# Altium PCB BLE_PCB_Rev2.PcbDoc (part 1 of 2)
Units mm, origin at the board's own origin, x right, y up, seen from the top; angles counter-clockwise.
Board outline 81.41 x 40.9 mm, 2 copper layers (Top Layer, Bottom Layer), stack 1.57 mm thick; 28 components, 29 nets, 238 pads, 40 vias.
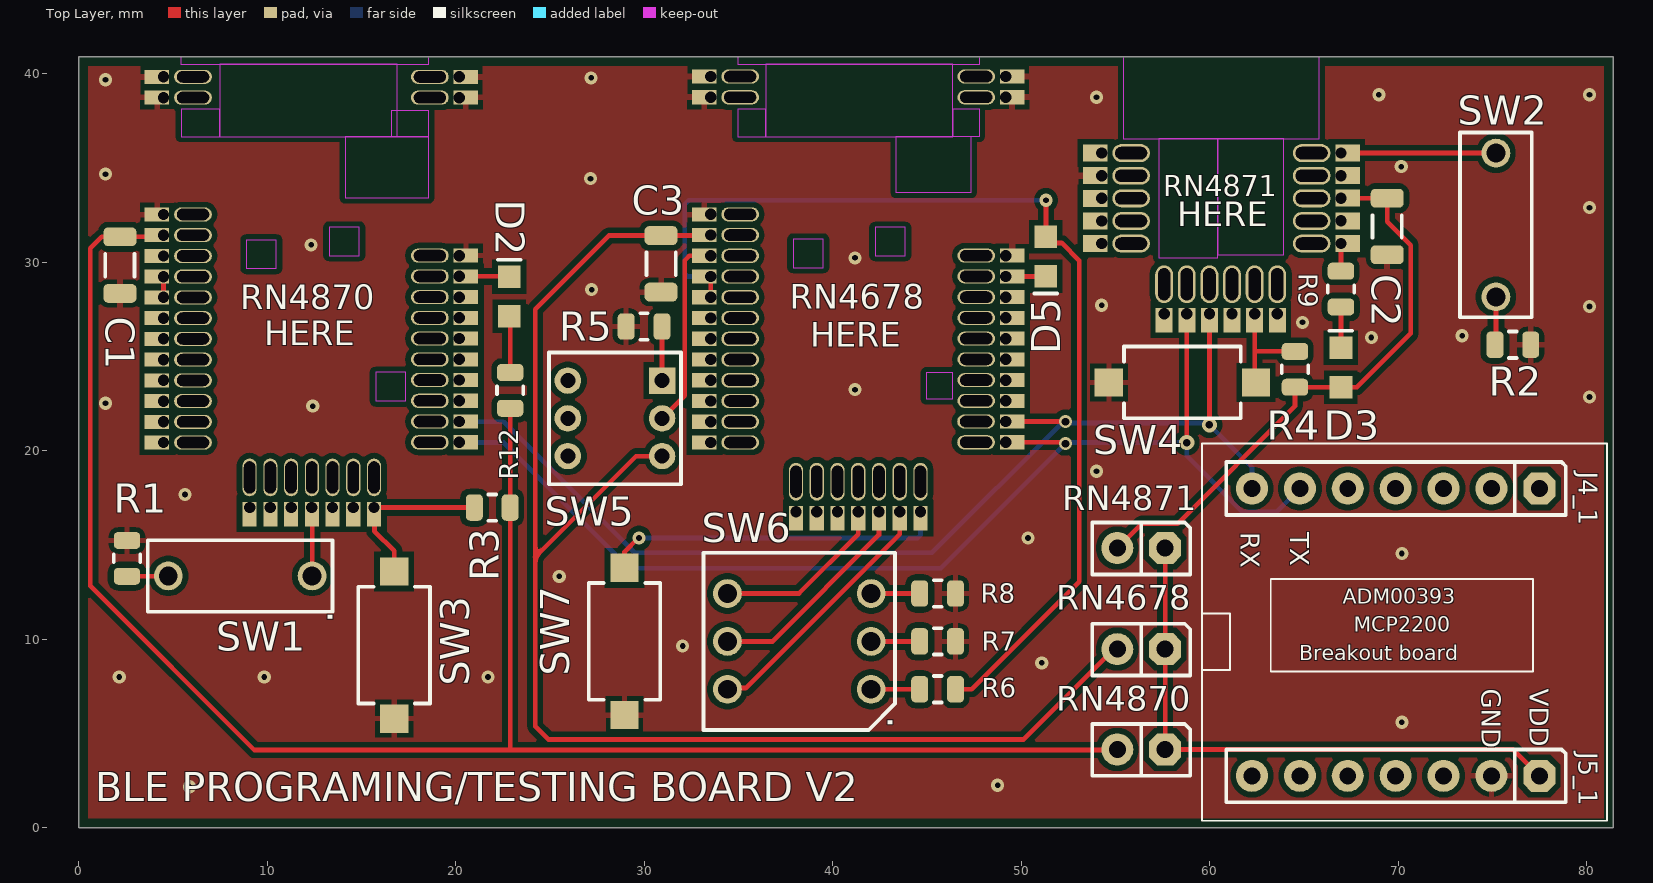
[diagram p0: Top Layer view]
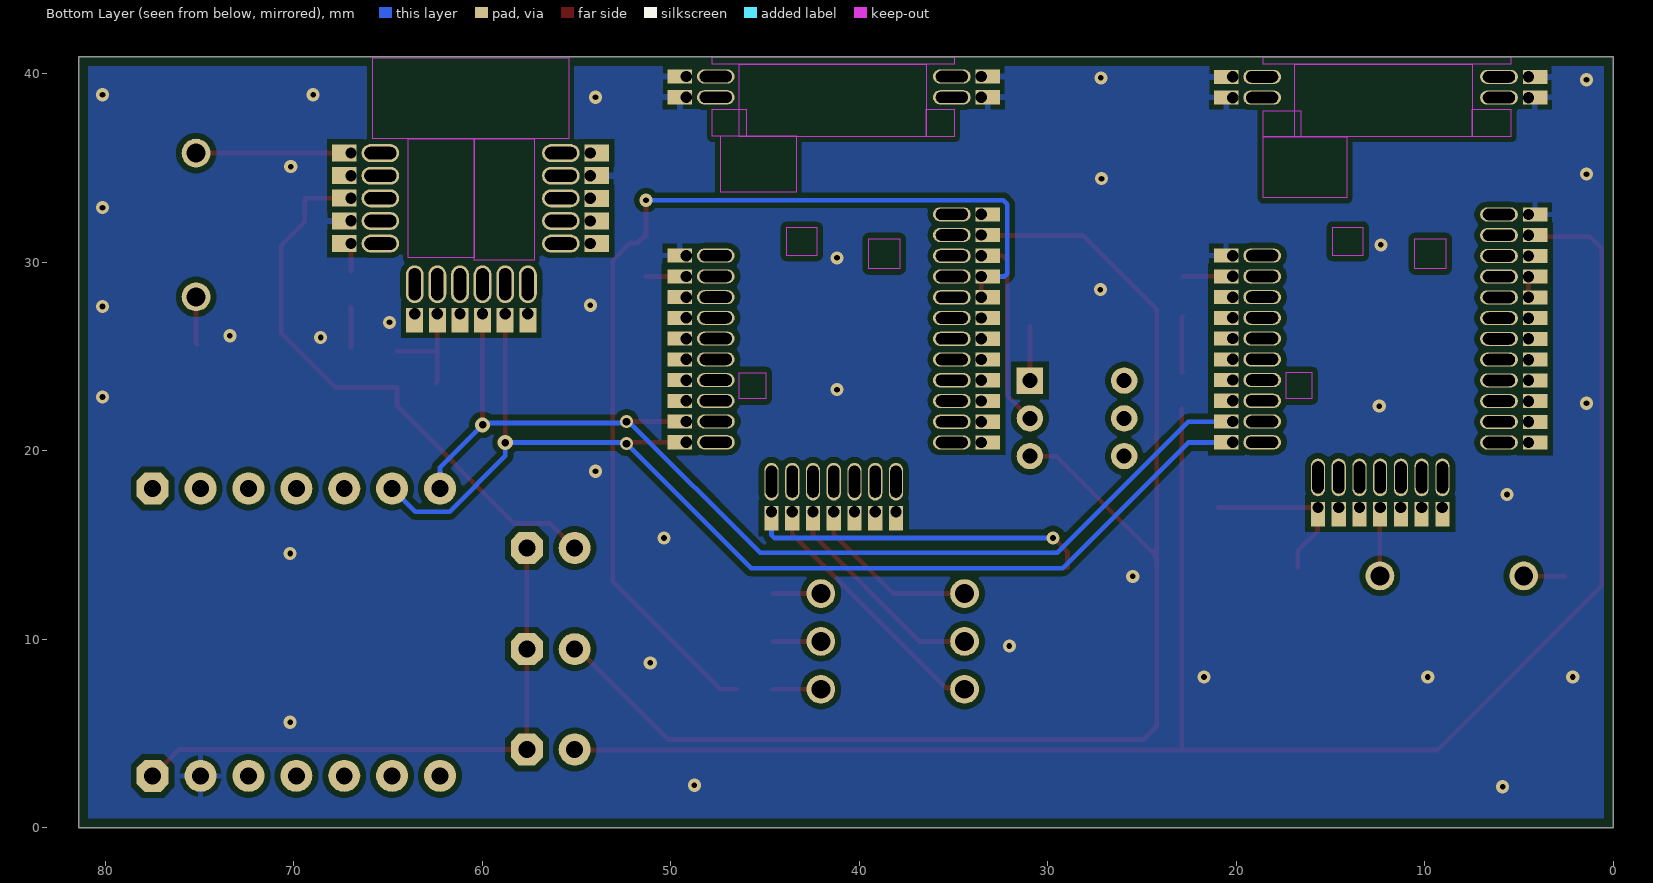
[diagram p1: Bottom Layer view, seen from below]

## Layer stack, top to bottom
Top Solder: solder mask 0.01, Solder Resist, Dk 3.5
Top Layer: signal copper 0.035
Dielectric1: core 1.5, FR-4, Dk 4.8
Bottom Layer: signal copper 0.035
Bottom Solder: solder mask 0.01, Solder Resist, Dk 3.5

## Board outline
0,0 0,40.904 81.407,40.904 81.407,0

## Design rules (kind name [scope] priority, off if disabled: settings)
AcuteAngle [All] p1: minimum=9.00000000000000E+0001 checktracksonly=TRUE
BoardOutlineClearance BoardOutlineClearance_Overlay [OnLayer('Top Overlay','Bottom Overlay')] p1: gap=0.2 ignorepadtopadclearanceinfootprint=FALSE
BoardOutlineClearance [All] p2: gap=0.5 ignorepadtopadclearanceinfootprint=FALSE
Clearance "Net to Polygon 0.5mm" [InNet('your net here') vs (IsRegion)] p1: gap=0.5 ignorepadtopadclearanceinfootprint=FALSE
Clearance "Poly 0.3mm" [(IsRegion)] p2: gap=0.3 ignorepadtopadclearanceinfootprint=FALSE
Clearance [All] p3: gap=0.25 ignorepadtopadclearanceinfootprint=TRUE
ComponentClearance ComponentClearance_ignore [HasFootprint('NET_TIE_0.5mm')] p1: gap=0 collisioncheckmode=3 verticalgap=0 showdistances=FALSE
ComponentClearance [All] p2: gap=0.2 collisioncheckmode=3 verticalgap=0.2 showdistances=FALSE
DiffPairsRouting [All] p1: maxlimit=0.25 minlimit=0.25 mostfreqgap=0.25 toplayer_minwidth=0.25 toplayer_maxwidth=0.25 toplayer_prefwidth=0.25 bottomlayer_minwidth=0.25 bottomlayer_maxwidth=0.25 bottomlayer_prefwidth=0.25 maxuncoupledlength=12.7
FabricationTestPointUsage TestPointUsage [All] p1: valid=0 allowmultiple=FALSE
FabricationTestpoint Testpoint [All] p1: side=3 testpointundercomponent=TRUE minsize=1.016 maxsize=2.54 preferedsize=1.524 minholesize=0 maxholesize=1.016 preferedholesize=0.813 testpointgrid=0.025 allowsidetop=TRUE allowsidebottom=TRUE usegrid=TRUE gridtolerance=0
HoleSize [All] p1: absolutevalues=TRUE maxlimit=6 minlimit=0.25 maxpercent=80.000 minpercent=20.000
HoleToHoleClearance [All] p1: gap=0.3 allowstackedmicrovias=FALSE
MinimumAnnularRing [All] p1: minimumring=0.15
MinimumSolderMaskSliver [All] p1: minsoldermaskwidth=0.15
PasteMaskExpansion PasteMaskExpansion_DNP [IsPad AND HasCompParameterValue('Populated','DNP')] p1: expansion=-5
PasteMaskExpansion [All] p2: expansion=0
PlaneClearance PlaneClearance_pads [IsPad] p1: clearance=0.3
PlaneClearance PlaneClearance_drill [IsObjectKind('Hole')] p2: clearance=0.4
PlaneConnect PlaneConnect_full [IsVia] p1: planeconnectstyle=Direct reliefexpansion=0.5 reliefentries=4 reliefconductorwidth=0.3 reliefairgap=0.3
PlaneConnect [All] p2: planeconnectstyle=Relief reliefexpansion=0.3 reliefentries=4 reliefconductorwidth=0.25 reliefairgap=0.25
PolygonConnect PolygonConnect_0.7 [IsNamedPolygon('0.7mm') vs (InPadClass('All Pads'))] p1: connectstyle=Relief reliefconductorwidth=0.7 reliefentries=4 polygonreliefangle="90 Angle" airgapwidth=0.25
PolygonConnect PolygonConnect_0.5 [IsNamedPolygon('0.5mm') vs (InPadClass('All Pads'))] p2: connectstyle=Relief reliefconductorwidth=0.5 reliefentries=4 polygonreliefangle="90 Angle" airgapwidth=0.25
PolygonConnect PolygonConnect_full [All vs IsVia or IsNamedPolygon('full')] p3: connectstyle=Direct reliefconductorwidth=0 reliefentries=4 polygonreliefangle="90 Angle" airgapwidth=0.254
PolygonConnect [All] p4: connectstyle=Relief reliefconductorwidth=0.3 reliefentries=4 polygonreliefangle="90 Angle" airgapwidth=0.25
RoomDefinition BLE_SCH_Rev1 [InComponentClass('BLE_SCH_Rev1')] p1: confinementstyle=ConfineIn formatcopy=TRUE lockcomponents=FALSE outline -327.18,-488.376 -276.38,-488.376 -276.38,-462.976 -327.18,-462.976
RoutingCorners [All] p1: cornerstyle=45-Degree minsetback=2.5 maxsetback=2.5
RoutingVias [All] p1: holewidth=0.4 width=0.8 viastyle="Through Hole" minholewidth=0.3 minwidth=0.7 maxholewidth=1.6 maxwidth=2.5
SMDToCorner [All] p1: distance=39370
ShortCircuit [IsNet] p1: allowed=FALSE
SilkToSilkClearance [All] p1: silktosilkclearance=0.15
SilkToSolderMaskClearance SilkscreenOverComponentPads [IsPad] p1: minsilkscreentomaskgap=0.2 clearancetoexposedcopper=TRUE
SolderMaskExpansion SolderMaskExpansion_Component_Via [IsComponentVia] p1: expansion=0.075 istentingtop=FALSE soldermaskfromhole=TRUE
SolderMaskExpansion [All] p2: expansion=0.1 istentingtop=FALSE
UnRoutedNet [All] p1: checkbadconnections=TRUE
ViasUnderSMD [All] p1: allowed=FALSE
Width [All] p1: maxlimit=7 minlimit=0.2 preferedwidth=0.25
15 further rules are at their usual default settings.

## Components (designator, comment, footprint, x,y, rotation, side; value= is the part's Value field where it differs from the comment)
C1 "Capacitor NP" CAP_C_1206 2.192,29.845 r270 top value=10uF
C2 "Capacitor NP" CAP_C_1206 69.407,31.893 r270 top value=10uF
C3 "Capacitor NP" CAP_C_1206 30.894,29.912 r90 top value=10uF
D2 "LED_blue" LED_0805_BLUE 22.84,28.181 r90 top value=BLUE
D3 "LED_blue" LED_0805_BLUE 66.956,24.418 r90 top value=BLUE
D5 "LED_blue" LED_0805_BLUE 51.308,30.295 r270 top value=BLUE
J4_1 "Header 1x7" HDR_M_2.54_1x7 69.857,17.995 r180 top locked value="HDR-2.54 Male 1x7"
J5_1 "Header 1x7" HDR_M_2.54_1x7 69.857,2.755 r180 top locked value="HDR-2.54 Male 1x7"
R1 "Resistor" RES_C_0805 2.565,14.29 r270 top value=4.7k
R2 "Resistor" RES_C_0805 76.073,25.622 r180 top value=4.7k
R3 "Resistor" RES_C_0805 21.94,16.983 r0 top value=4.7k
R4 "Resistor" RES_C_0805 64.516,24.318 r90 top value=4.7k
R5 "Resistor" RES_C_0805 29.993,26.59 r0 top value=20k
R6 "Resistor" RES_C_0805 45.564,7.346 r0 top value=10
R7 "Resistor" RES_C_0805 45.564,9.886 r0 top value=4.7k
R8 "Resistor" RES_C_0805 45.564,12.426 r0 top value=4.7k
R9 "Resistor" RES_C_0805 66.956,28.575 r270 top value=330
R12 "Resistor" RES_C_0805 22.89,23.2 r270 top value=330
RN4678 "Header 1x2" HDR_M_2.54_1x2 56.362,9.475 r180 top value="HDR-2.54 Male 1x2" (schematic designator J4)
RN4870 "Header 1x2" HDR_M_2.54_1x2 56.362,4.155 r180 top value="HDR-2.54 Male 1x2" (schematic designator J3)
RN4871 "Header 1x2" HDR_M_2.54_1x2 56.362,14.839 r180 top value="HDR-2.54 Male 1x2" (schematic designator J5)
SW1 "Switch DIP 1 Pos" "SW_TH_2.54MM X 1 418117270901" 8.571,13.356 r90 top value="DIP 1 SPST"
SW2 "Switch DIP 1 Pos" "SW_TH_2.54MM X 1 418117270901" 75.177,31.973 r180 top value="DIP 1 SPST"
SW3 "Switch 2 Pin" "SW_TACT_SMD_CK_RS-282G05A3-SM RT" 16.738,9.689 r270 top value=RS-282G05A-SM_RT
SW4 "Switch 2 Pin" "SW_TACT_SMD_CK_RS-282G05A3-SM RT" 58.547,23.622 r180 top value=RS-282G05A-SM_RT
SW5 "Switch on-off 6 Pin" SW_TACT_TH_PS07-22L-PF 28.448,21.717 r270 top value="TACT DPST"
SW6 "Switch DIP 3 Pos" "SW_TH_2.54MM X 3 Omron" 38.227,9.886 r90 top value=DSS-03-B-PF
SW7 "Switch 2 Pin" "SW_TACT_SMD_CK_RS-282G05A3-SM RT" 28.956,9.886 r270 top value=RS-282G05A-SM_RT

## Footprints (in the part's own frame and the unit in brackets; to place one, negate y for a bottom-side part, rotate by r counter-clockwise, add the part's x,y. Pads: shape width x height; smd on the part's side, far side on the other; paste and mask are expansions set on the pad)
CAP_C_1206 [mm] "Chip Capacitor, 2-Leads, Body 3.2x1.6mm, IPC Medium Density"
  rrect50% 1x1.75 smd: 1(-1.5,0) 2(1.5,0)
  silkscreen extent -0.6,-0.77 0.6,0.77, body extent -1.6,-0.8 1.6,0.8, height 1
HDR_M_2.54_1x2 [mm] "Header Male Vertical 4 Way 2.54mm Pitch"
  oct 1.7x1.7 hole 0.9: 1(-1.27,0)
  round 1.7 hole 0.9: 2(1.27,0)
  silkscreen extent -2.6,-1.35 2.6,1.4, body extent -2.54,-1.27 2.54,1.27, height 5.94
HDR_M_2.54_1x7 [mm] "Header Male Vertical 7 Way 2.54mm Pitch"
  oct 1.7x1.7 hole 0.9: 1(-7.62,0)
  round 1.7 hole 0.9: 2(-5.08,0) 3(-2.54,0) 4(0,0) 5(2.54,0) 6(5.08,0) 7(7.62,0)
  silkscreen extent -9.02,-1.4 8.98,1.4, body extent -8.88,-1.27 8.89,1.28, height 5.94
LED_0805_BLUE [mm]
  rect 1.2x1.2 smd: 1(-1.05,0) 2(1.05,0)
  silkscreen extent 1.95,-0.6 1.95,0.6, body extent -1.01,-0.62 1.01,0.63, height 1.1
RES_C_0805 [mm] "Chip Resistor, 2-Leads, Body 2.0x1.3mm, IPC Medium Density"
  rrect50% 0.9x1.4 smd: 1(-0.95,0) 2(0.95,0)
  silkscreen extent -0.2,-0.7 0.2,0.7, body extent -1,-0.63 1,0.63, height 0.78
"SW_TACT_SMD_CK_RS-282G05A3-SM RT" [mm]
  rect 1.5x1.5 smd: 1(-3.9,0) 2(3.9,0)
  silkscreen extent -3.1,-1.9 3.1,1.9, body extent -4,-1.8 4,1.8, height 2.5
SW_TACT_TH_PS07-22L-PF [mm] "Samtec 2mm Pitch Header 2x5 Pos"
  rect 1.4x1.4 hole 0.8: 1(-2,2.5)
  round 1.4 hole 0.8: 2(0,2.5) 3(2,2.5) 4(-2,-2.5) 5(0,-2.5) 6(2,-2.5)
  silkscreen extent -3.5,-3.5 3.5,3.5, body extent -3.2,-3.2 3.2,3.2
"SW_TH_2.54MM X 1 418117270901" [mil]
  round 60 hole 39.37: 1(0,-150.11) 2(0.01,150.12)
  silkscreen extent -75,-193 75,193, body extent -70,-189 70,189, height 248
"SW_TH_2.54MM X 3 Omron" [mil]
  round 60 hole 39.37: 1(-100,-150) 2(0,-150) 3(100,-150) 4(100,150) 5(0,150) 6(-100,150)
  silkscreen extent -185,-200 185,200, body extent -181,-195 181,195, height 280

## Part data
C1 C2 C3: library part CAP0461, Manufacturer 1=Murata, Manufacturer 2="Taiyo Yuden", Manufacturer Part Number 1=GRM31CR60J107ME39L, Manufacturer Part Number 2=JMK316BJ107ML-T, Operating Temperature="-55C to +85C", Package=1206, Supplier Part Number 1=490-4539-1-ND, Temperature Coefficient=X5R, Tolerance=20%, Voltage=6.3V, Category=Capacitor, ComponentLink1Description="SVN Datasheet", ComponentLink1URL=https://chn-vm-apps.microchip.com/mchprepo/parts/Datasheets/L0005E.pdf, ComponentLink2Description="Local Datasheet", ComponentLink2URL=C:\ALTIUM_WORK\00001_MCHP-CDB\Datasheets\L0005E.pdf, ComponentLink3Description="Open Symbol", ComponentLink3URL="C:\ALTIUM_WORK\00001_MCHP-CDB\Library\LibraryRefs\Capacitor NP.SchLib", ComponentLink4Description="Open Footprint", ComponentLink4URL=C:\ALTIUM_WORK\00001_MCHP-CDB\Library\Footprints\CAP_C_1206.PcbLib, ComponentLink5Description="Open Footprint 2", ComponentLink6Description="Open Footprint 3", ComponentLink7Description="Open Footprint 4", Description_="CAP CER 100uF 6.3V 20% X5R SMD 1206", Dev Tools Status=Production, MCHP-ID=CAP0461, Populated=Yes, Quantity Override=1, Revision=1, Status="MCL Design", Supplier 1=Digi-Key, Supplier 2=Digi-Key, Supplier Part Number 2=587-1963-1-ND, Symbol="Capacitor NP", Type=Ceramic
D2 D3 D5: library part DIODE1080, "LED", MCHP-ID=DIODE1080
J4_1: library part CON0448, Manufacturer 1="Wurth Electronics Inc", Manufacturer 2=Samtec, Manufacturer Part Number 1=61300711121, Manufacturer Part Number 2=TSW-107-07-S-S, Manufacturer Part Number 3=TSW-107-07-G-S, Supplier Part Number 1=732-5320-ND, Category=Connector, ComponentLink1Description="SVN Datasheet", ComponentLink1URL=https://chn-vm-apps.microchip.com/mchprepo/parts/Datasheets/TSW-XXX-XX-XXX-X-XX-XXX-MKT.pdf, ComponentLink2Description="Local Datasheet", ComponentLink2URL=C:\ALTIUM_WORK\00001_MCHP-CDB\Datasheets\TSW-XXX-XX-XXX-X-XX-XXX-MKT.pdf, ComponentLink3Description="Open Symbol", ComponentLink3URL="C:\ALTIUM_WORK\00001_MCHP-CDB\Library\LibraryRefs\Header 1x7.SchLib", ComponentLink4Description="Open Footprint", ComponentLink4URL=C:\ALTIUM_WORK\00001_MCHP-CDB\Library\Footprints\HDR_M_2.54_1x7.PcbLib, ComponentLink5Description="Open Footprint 2", ComponentLink6Description="Open Footprint 3", ComponentLink7Description="Open Footprint 4", Description_="CON HDR-2.54 Male 1x7 Gold 5.84MH TH VERT", Dev Tools Status=Production, Manufacturer 3=Samtec, MCHP-ID=CON0448, Populated=Yes, Quantity Override=1, Revision=1, Status="MCL Design", Supplier 1=Digi-Key, Supplier 2=Digi-Key, Supplier 3=Samtec, Supplier Part Number 2=SAM1033-07-ND, Supplier Part Number 3=TSW-107-07-G-S, Symbol="Header 1x7", Type="Header 2.54mm"
J5_1: library part CON0448, Manufacturer 1=Samtec, Manufacturer Part Number 1=TSW-107-07-S-S, Manufacturer Part Number 2=TSW-107-07-G-S, Category=Connector, ComponentLink1Description=Datasheet, ComponentLink1URL=https://chn-vm-apps.microchip.com/mchprepo/parts/Datasheets/TSW-XXX-XX-XXX-X-XX-XXX-MKT.pdf, Description_="CON HDR-2.54 Male 1x7 Gold 5.84MH TH VERT", Manufacturer 2=Samtec, MCHP-ID=CON0448, Populated=Yes, Quantity Override=1, Revision=1, Status=Production, Supplier 1=Samtec, Supplier 2=Samtec, Supplier Part Number 1=TSW-107-07-S-S, Supplier Part Number 2=TSW-107-07-G-S, Type="Header 2.54mm"
R1 R2 R3 R4 R5 R6 R7 R8 R9 R12: library part RES1372, Package=0805, Tolerance=0.1%, MCHP-ID=RES1372
RN4678 RN4870 RN4871: library part CON1312, Manufacturer 1="Sullins Connector Solutions", Manufacturer 2="SHENZHEN JUNHAO ENGINEERING", Manufacturer Part Number 1=PREC002SAAN-RC, Manufacturer Part Number 2=R-211-0211-0021-000, Supplier Part Number 1=S1012EC-02-ND, Category=Connector, ComponentLink1Description="SVN Datasheet", ComponentLink1URL="https://chn-vm-apps.microchip.com/mchprepo/parts/Datasheets/z RzCzzzSzzN-RC, ST,11635-B.pdf", ComponentLink2Description="Local Datasheet", ComponentLink2URL="C:\ALTIUM_WORK\00001_MCHP-CDB\Datasheets\z RzCzzzSzzN-RC, ST,11635-B.pdf", ComponentLink3Description="Open Symbol", ComponentLink3URL="C:\ALTIUM_WORK\00001_MCHP-CDB\Library\LibraryRefs\Header 1x2.SchLib", ComponentLink4Description="Open Footprint", ComponentLink4URL=C:\ALTIUM_WORK\00001_MCHP-CDB\Library\Footprints\HDR_M_2.54_1x2.PcbLib, ComponentLink5Description="Open Footprint 2", ComponentLink6Description="Open Footprint 3", ComponentLink7Description="Open Footprint 4", Description_="CON HDR-2.54 Male 1x2 Tin 5.84MH TH VERT", Dev Tools Status=Production, MCHP-ID=CON1312, Owner="Randolph Sobrepena", Populated=YES, Quantity Override=1, Restricted Sourcing=No, Revision=3, Status="MCL Design", Supplier 1=Digi-Key, Supplier 2="SHENZHEN JUNHAO ENGINEERING", Supplier Part Number 2=R-211-0211-0021-000, Symbol="Header 1x2", Type="Header 2.54mm"
SW1 SW2: library part SWITCH1055, Current=25mA, Manufacturer 1="Würth Elektronik", Manufacturer Part Number 1=418117270901, Operating Temperature="-40°C to 85°C", Supplier Part Number 1=732-3831-5-ND, Voltage=24V, Category=Switch, ComponentLink1Description="SVN Datasheet", ComponentLink1URL=https://chn-vm-apps.microchip.com/mchprepo/parts/Datasheets/4181172709xx.pdf, ComponentLink2Description="Local Datasheet", ComponentLink2URL=C:\ALTIUM_WORK\00001_MCHP-CDB\Datasheets\4181172709xx.pdf, ComponentLink3Description="Open Symbol", ComponentLink3URL="C:\ALTIUM_WORK\00001_MCHP-CDB\Library\LibraryRefs\Switch DIP 1 Pos.SchLib", ComponentLink4Description="Open Footprint", ComponentLink4URL="C:\ALTIUM_WORK\00001_MCHP-CDB\Library\Footprints\SW_TH_2.54MM X 1 418117270901.PcbLib", ComponentLink5Description="Open Footprint 2", ComponentLink6Description="Open Footprint 3", ComponentLink7Description="Open Footprint 4", Description_="SWITCH DIP 1 SPST 24V 25mA 418117270901 TH", Dev Tools Status=Production, MCHP-ID=SWITCH1055, Owner="Gabor Bihari", Populated=YES, Quantity Override=1, Revision=2, Status="MCL Design", Supplier 1=Digi-Key, Symbol="Switch DIP 1 Pos", Type=DIP
SW3 SW4 SW7: library part SWITCH1057, "Switch", Current=50mA, Manufacturer 1=C&K, Manufacturer 2="C&K Components", Manufacturer Part Number 1=KSR211GLFS, Manufacturer Part Number 2="RS-282G05A3-SM RT", Voltage=12V, Category=Switch, ComponentLink1Description="SVN Datasheet", ComponentLink1URL=https://chn-vm-apps.microchip.com/mchprepo/parts/Datasheets/RS-282G05A-SM_RT.pdf, ComponentLink2Description="Local Datasheet", ComponentLink2URL=C:\ALTIUM_WORK\00001_MCHP-CDB\Datasheets\RS-282G05A-SM_RT.pdf, ComponentLink3Description="Open Symbol", ComponentLink3URL="C:\ALTIUM_WORK\00001_MCHP-CDB\Library\LibraryRefs\Switch 2 Pin.SchLib", ComponentLink4Description="Open Footprint", ComponentLink4URL="C:\ALTIUM_WORK\00001_MCHP-CDB\Library\Footprints\SW_TACT_SMD_CK_RS-282G05A3-SM RT.PcbLib", ComponentLink5Description="Open Footprint 2", ComponentLink6Description="Open Footprint 3", ComponentLink7Description="Open Footprint 4", Description_="SWITCH TACT SPST 12V 50mA RS-282G05A3-SM RT", Dev Tools Status=Production, MCHP-ID=SWITCH1057, Owner="Gabor Bihari", Populated=YES, Quantity Override=1, Revision=2, Status="MCL Design", Supplier 1=C&K, Supplier 2=Digi-Key, Supplier Part Number 1=KSR211GLFS, Supplier Part Number 2=CKN10384CT-ND, Symbol="Switch 2 Pin", Type=Tactile
SW5: library part SWITCH1041, "PS-5177", Manufacturer 1=E-Switch, Manufacturer Part Number 1=TL2230OAF140, Category=Switch, ComponentLink1Description="SVN Datasheet", ComponentLink2Description="Local Datasheet", ComponentLink3Description="Open Symbol", ComponentLink3URL="C:\ALTIUM_WORK\00001_MCHP-CDB\Library\LibraryRefs\Switch on-off 6 Pin.SchLib", ComponentLink4Description="Open Footprint", ComponentLink4URL=C:\ALTIUM_WORK\00001_MCHP-CDB\Library\Footprints\SW_TACT_TH_PS07-22L-PF.PcbLib, ComponentLink5Description="Open Footprint 2", ComponentLink6Description="Open Footprint 3", ComponentLink7Description="Open Footprint 4", Description_="SWITCH TACTILE PUSH ON-OFF 6 PIN", Dev Tools Status=Production, MCHP-ID=SWITCH1041, Owner="Duane Burt", Populated=YES, Quantity Override=1, Revision=2, Status="MCL Design", Supplier 1=E-Switch, Supplier Part Number 1=TL2230OAF140, Symbol="Switch on-off 6 Pin", Type=Tactile
SW6: library part SWITCH1042, "Switch DIP", Manufacturer 1=C&K, Manufacturer 2="DIPTRONICS MANUFACTURING INC", Manufacturer 3="ROKI ELECTRONICS CO., LTD.", Manufacturer Part Number 1=BDB03, Manufacturer Part Number 2=NDS-03V, Manufacturer Part Number 3=DSS-03-B-PF, Manufacturer Part Number 4=BD03, Supplier Part Number 1=CKN12078-ND, Category=Switch, ComponentLink1Description="SVN Datasheet", ComponentLink2Description="Local Datasheet", ComponentLink3Description="Open Symbol", ComponentLink3URL="C:\ALTIUM_WORK\00001_MCHP-CDB\Library\LibraryRefs\Switch DIP 3 Pos.SchLib", ComponentLink4Description="Open Footprint", ComponentLink4URL="C:\ALTIUM_WORK\00001_MCHP-CDB\Library\Footprints\SW_TH_2.54MM X 3 Omron.PcbLib", ComponentLink5Description="Open Footprint 2", ComponentLink6Description="Open Footprint 3", ComponentLink7Description="Open Footprint 4", Description_="SWITCH DIP 3 SPST 24VDC 25MA DSS-03-B-PF TH", Dev Tools Status=Production, Manufacturer 4=C&K, MCHP-ID=SWITCH1042, Owner="Duane Burt", Populated=YES, Quantity Override=1, Revision=4, Status="MCL Design", Supplier 1=Digi-Key, Supplier 2=Mouser, Supplier 3="ROKI ELECTRONICS CO., LTD.", Supplier 4=Digi-Key, Supplier Part Number 2=113-NDS03V, Supplier Part Number 3=DSS-03-B-PF, Supplier Part Number 4=CKN3002-ND, Symbol="Switch DIP 3 Pos", Type=DIP

## Free pads (board coordinates)
  rect 1.3x0.75 hole 0.6 copper offset -0.35,0: 2(4.507,24.832) 2(4.507,20.432) 2(4.507,21.532) 2(4.507,22.632) 2(4.507,23.732) 2(4.507,25.932) 2(4.507,27.032) 2(4.507,28.132) 2(4.507,29.232) 2(4.507,30.332) 2(4.507,31.432) 2(4.507,32.532) 2(4.507,38.729) 2(4.507,39.829) 2(33.528,24.838) 2(33.528,20.437) 2(33.528,21.538) 2(33.528,22.637) 2(33.528,23.738) 2(33.528,25.938) 2(33.528,27.038) 2(33.528,28.137) 2(33.528,30.338) 2(33.528,31.438) 2(33.528,32.538) 2(33.528,38.745) 2(33.528,39.845) ""(33.528,29.238)
  rect 0.75x1.3 hole 0.6 copper offset 0,-0.35: 2(9.071,16.989) 2(10.171,16.989) 2(11.271,16.989) 2(12.371,16.989) 2(13.471,16.989) 2(14.571,16.989) 2(15.671,16.989) 2(38.053,16.764) 2(39.153,16.764) 2(40.253,16.764) 2(41.353,16.764) 2(42.453,16.764) 2(43.553,16.764) 2(44.653,16.764)
  rect 1.3x0.75 hole 0.6 copper offset 0.35,0: 2(20.193,20.447) 2(20.193,21.547) 2(20.193,22.647) 2(20.193,23.747) 2(20.193,24.847) 2(20.193,25.947) 2(20.193,27.047) 2(20.193,28.147) 2(20.193,29.247) 2(20.193,30.347) 2(20.193,38.729) 2(20.193,39.829) 2(49.172,20.445) 2(49.172,21.545) 2(49.172,22.645) 2(49.172,23.745) 2(49.172,24.845) 2(49.172,25.945) 2(49.172,27.045) 2(49.172,28.145) 2(49.172,29.245) 2(49.172,30.345) 2(49.172,38.745) 2(49.172,39.845)
  rect 1.3x0.9 hole 0.6 copper offset -0.35,0: 2(54.261,30.986) 2(54.261,32.186) 2(54.261,33.386) 2(54.261,34.586) 2(54.261,35.786)
  rect 0.9x1.3 hole 0.6 copper offset 0,-0.35: 2(57.579,27.271) 2(58.779,27.271) 2(59.979,27.271) 2(61.179,27.271) 2(62.379,27.271) 2(63.579,27.271)
  rect 1.3x0.9 hole 0.6 copper offset 0.35,0: 2(66.956,30.986) 2(66.956,32.192) 2(66.956,33.393) 2(66.956,34.592) 2(66.956,35.786)
  oval 2x0.75 hole 0.6 slot 1.7 at 0 deg: ""(6.069,30.332) ""(6.069,31.432) ""(6.069,32.532) ""(6.069,38.729) ""(6.069,39.829) ""(6.069,20.432) ""(6.069,21.532) ""(6.069,22.632) ""(6.069,23.732) ""(6.069,24.832) ""(6.069,25.932) ""(6.069,27.032) ""(6.069,28.132) ""(6.069,29.232) ""(18.631,22.647) ""(18.631,23.747) ""(18.631,24.847) ""(18.631,25.947) ""(18.631,27.047) ""(18.631,28.147) ""(18.631,29.247) ""(18.631,30.347) ""(18.631,20.447) ""(18.631,21.547) ""(18.631,38.729) ""(18.631,39.829) ""(35.09,30.338) ""(35.09,31.438) ""(35.09,32.538) ""(35.09,20.437) ""(35.09,21.537) ""(35.09,22.637) ""(35.09,23.737) ""(35.09,24.837) ""(35.09,25.937) ""(35.09,27.037) ""(35.09,28.137) ""(35.09,29.237) ""(35.09,38.745) ""(35.09,39.845) ""(47.603,21.545) ""(47.603,20.445) ""(47.61,22.645) ""(47.61,23.745) ""(47.61,24.845) ""(47.61,25.945) ""(47.61,27.045) ""(47.61,28.145) ""(47.61,29.245) ""(47.61,30.345) ""(47.61,38.745) ""(47.61,39.845)
  oval 0.75x2 hole 0.6 slot 1.7 at 90 deg: ""(9.071,18.584) ""(10.171,18.584) ""(11.271,18.584) ""(12.371,18.584) ""(13.471,18.584) ""(14.571,18.584) ""(15.671,18.584) ""(38.053,18.359) ""(39.153,18.359) ""(40.253,18.359) ""(41.353,18.359) ""(42.453,18.359) ""(43.553,18.359) ""(44.653,18.359)
  oval 2x0.95 hole 0.65 slot 1.7 at 0 deg: ""(55.828,32.186) ""(55.828,35.786) ""(55.828,30.986) ""(55.828,33.386) ""(55.828,34.586) ""(65.4,30.986) ""(65.4,32.186) ""(65.4,33.386) ""(65.4,34.586) ""(65.4,35.786)
  oval 0.95x2 hole 0.65 slot 1.7 at 90 deg: ""(57.579,28.829) ""(58.779,28.829) ""(59.979,28.829) ""(61.179,28.829) ""(62.379,28.829) ""(63.579,28.829)

## Via types
v1: diameter 0.7, hole 0.3, Top Layer to Bottom Layer, tented both sides, 36 vias
v2: diameter 0.8, hole 0.4, Top Layer to Bottom Layer, tented both sides, 2 vias
v3: diameter 0.7, hole 0.4, Top Layer to Bottom Layer, tented both sides, 2 vias

## Nets (pads, with @x,y where several pads share a name; then routed paths per layer and width w, separated by ;. In a path a pad name is that pad's centre, name@x,y a point inside that pad or via, vN(x,y) a via of type N, cw(c..) or ccw(c..) an arc to the next point about the centre after c; other vN are vias at no path point)
3.3V: J5_1.1 RN4678.1 RN4870.1 RN4871.1 | length 31.1
  Top Layer w0.25: RN4871.1 RN4678.1 RN4870.1 76.077,4.155 J5_1.1
3.3V_1: C1.1 pad.2@4.507,31.432 R3.2 R12.2 RN4870.2 | length 98.3
  Top Layer w0.25: pad.2@4.507,31.432 4.42,31.345 1.236,31.345 0.625,30.734 0.625,12.828 9.328,4.125 22.89,4.125 ; R12.2 22.89,4.125 ; RN4870.2 55.062,4.125 22.89,4.125
3.3V_2: C3.2 pad.2@33.528,31.438 RN4678.2 SW5.3 | length 75.2
  Top Layer w0.25: SW5.3 30.943,19.712 29.565,19.712 24.215,14.362 ; pad.2@33.528,31.438 33.502,31.412 C3.2 28.121,31.412 27.881,31.173 24.215,27.506 24.215,14.362 ; RN4678.2 54.914,9.475 50.123,4.684 24.907,4.684 24.215,5.376 24.215,14.362
3.3V_3: C2.1 D3.1 pad.2@66.956,33.393 R4.1 RN4871.2 | length 31
  Top Layer w0.25: RN4871.2 56.388,16.135 58.299,16.135 64.516,22.352 R4.1 D3.1 67.806,23.368 70.657,26.219 70.657,30.902 69.407,32.152 C2.1 pad.2@66.956,33.393
EAN: pad.2@43.553,16.764 SW6.6 | length 13.7
  Top Layer w0.25: SW6.6 34.482,7.411 35.39,7.411 43.553,15.574 pad.2@43.553,16.764
GND: C1.2 C2.2 C3.1 J5_1.2 pad.2@4.507,32.532 pad.2@4.507,38.729 pad.2@4.507,39.829 pad.2@20.193,30.347 pad.2@20.193,38.729 pad.2@20.193,39.829 pad.2@33.528,32.538 pad.2@33.528,38.745 pad.2@33.528,39.845 pad.2@49.172,30.345 pad.2@49.172,38.745 pad.2@49.172,39.845 pad.2@54.261,34.586 pad.2@66.956,32.192 R1.1 R2.1 R5.1 R7.2 R8.2 SW3.2 SW4.2 SW7.2
  other v1: 5.875,2.18 48.745,2.255 70.19,5.593 2.153,8.001 9.852,8.001 21.717,8.001 51.088,8.747 32.038,9.641 25.492,13.335 70.19,14.547 50.359,15.369 5.644,17.68 53.988,18.912 12.416,22.367 1.431,22.522 80.137,22.846 41.181,23.241 68.569,26.008 73.384,26.097 64.918,26.806 80.137,27.648 54.261,27.712 27.211,28.545 41.181,30.226 12.333,30.917 80.137,32.893 27.148,34.432 1.431,34.671 70.153,35.067 53.988,38.745 68.969,38.877 80.137,38.877 1.431,39.679 27.184,39.776
INT_3V3: D5.1 pad.2@33.528,28.137 pad.@33.528,29.238 R6.2 | length 55.7
  Top Layer w0.25: pad.2@33.528,28.137 pad.@33.528,29.238 ; R6.2 47.371,7.346 53.07,13.045 53.07,30.088 52.137,31.021 51.76,31.021 51.436,31.345 D5.1 v1(51.308,33.288)
  Bottom Layer w0.25: pad.@33.528,29.238 32.299,29.238 32.153,29.384 32.153,33.068 32.373,33.288 v1(51.308,33.288)
LED: D5.2 pad.2@49.172,29.245 | length 2.1
  Top Layer w0.25: pad.2@49.172,29.245 D5.2
NetD2_1: D2.1 R12.1 | length 3.1
  Top Layer w0.25: R12.1@22.84,24.2 R12.1 22.89,27.082 D2.1
NetD3_2: D3.2 R9.2 | length 2.2
  Top Layer w0.25: D3.2 R9.2
NetR1_2: R1.2 SW1.2 | length 2.2
  Top Layer w0.25: R1.2 4.741,13.34 SW1.2
NetR2_2: R2.2 SW2.2 | length 2.6
  Top Layer w0.25: R2.2 75.177,25.676 SW2.2
NetR5_2: R5.2 SW5.1 | length 2.9
  Top Layer w0.25: R5.2 30.943,23.722 SW5.1
NetR6_1: R6.1 SW6.1 | length 2.6
  Top Layer w0.25: SW6.1 R6.1
NetR7_1: R7.1 SW6.2 | length 2.6
  Top Layer w0.25: SW6.2 R7.1
NetR8_1: R8.1 SW6.3 | length 2.6
  Top Layer w0.25: SW6.3 R8.1
P02: D2.2 pad.2@20.193,29.247 | length 2.7
  Top Layer w0.25: pad.2@20.193,29.247 22.825,29.247 D2.2
P02_1: pad.2@66.956,30.986 R9.1 | length 1.5
  Top Layer w0.25: R9.1 pad.2@66.956,30.986
P2_4: pad.2@42.453,16.764 SW6.5 | length 11.6
  Top Layer w0.25: SW6.5 36.808,9.886 42.453,15.531 pad.2@42.453,16.764
P20: pad.2@12.371,16.989 SW1.1 | length 3.6
  Top Layer w0.25: SW1.1 12.394,13.367 pad.2@12.394,16.983
P20_1: pad.2@66.956,35.786 SW2.1 | length 8.4
  Top Layer w0.25: pad.2@67.075,35.906 66.956,35.786 69.847,35.786 69.853,35.792 70.453,35.792 70.459,35.786 SW2.1
P20_2: pad.2@41.353,16.764 SW6.4 | length 9.4
  Top Layer w0.25: SW6.4 38.207,12.426 41.353,15.572 pad.2@41.353,16.764
RST_N: pad.2@15.671,16.989 R3.1 SW3.1 | length 9
  Top Layer w0.25: pad.2@15.671,16.989 15.676,16.983 pad.2@15.694,16.983 ; SW3.1@16.738,13.786 16.738,14.695 15.694,15.739 pad.2@15.694,16.983 ; R3.1 pad.2@15.694,16.983
RST_N1: pad.2@62.379,27.271 R4.2 SW4.1 | length 5.8
  Top Layer w0.25: pad.2@62.379,27.271 62.379,25.318 62.379,23.69 SW4.1 ; 62.429,25.268 R4.2
RST_N2: pad.2@44.653,16.764 SW7.1 | length 18.3
  Top Layer w0.25: SW7.1 28.956,14.636 29.691,15.371 v1(29.727,15.371) v1@29.804,15.293
  Bottom Layer w0.25: v1(29.727,15.371) 44.506,15.371 44.653,15.517 pad.2@44.653,16.764
RX_MCP: J4_1.7 pad.2@20.193,21.547 pad.2@49.172,21.545 pad.2@59.979,27.271 | length 58.9
  Top Layer w0.25: pad.2@20.193,21.547 pad.2@20.208,21.532 ; pad.2@49.172,21.545 v3(52.345,21.545) ; v2(59.979,21.369) pad.2@59.979,27.271
  Bottom Layer w0.25: pad.2@20.193,21.547 20.208,21.532 22.54,21.532 29.487,14.585 45.263,14.585 v3@52.223,21.545 ; pad.2@49.172,21.545 pad.2@49.18,21.537 ; v3(52.345,21.545) 52.416,21.474 59.874,21.474 62.237,19.111 J4_1.7
SW_BTN: pad.2@33.528,30.338 SW5.2 | length 10.3
  Top Layer w0.25: SW5.2 32.153,22.922 32.153,30.089 32.401,30.338 pad.2@33.528,30.338
TX_MCP: J4_1.6 pad.2@20.193,20.447 pad.2@49.172,20.445 pad.2@58.779,27.271 | length 62.6
  Top Layer w0.25: pad.2@20.193,20.447 pad.2@20.2,20.44 ; pad.2@49.172,20.445 52.275,20.445 v3(52.345,20.375) ; v2(58.779,20.434) pad.2@58.779,27.271
  Bottom Layer w0.25: pad.2@20.193,20.447 20.2,20.44 22.532,20.44 29.204,13.768 45.738,13.768 v3(52.345,20.375) 52.404,20.434 v2(58.779,20.434) 58.779,19.721 61.73,16.77 62.443,16.77 62.449,16.764 63.546,16.764 J4_1.6
VDD_IO: pad.2@4.507,28.132 pad.2@4.507,29.232 | length 1.1
  Top Layer w0.25: pad.2@4.507,28.132 pad.2@4.507,29.232
pads on no net: J4_1.1 J4_1.2 J4_1.3 J4_1.4 J4_1.5 J5_1.3 J5_1.4 J5_1.5 J5_1.6 J5_1.7 SW5.4 SW5.5 SW5.6

## Polygon pours and split planes (outlines as drawn)
GND on Bottom Layer "GND_L02_P001" (solid, pour order 1): 0,41.021 0,0 81.407,0 81.407,41.021
GND on Top Layer "GND_L01_P000" (solid, pour order 0): 0,41.021 0,0 81.407,0 81.407,41.021

## Keep-outs
Top Layer:
  rectangle: 43.353,33.698 47.353,36.662
  rectangle: 44.959,22.745 46.353,24.137
  rectangle: 42.253,30.345 43.853,31.845
  rectangle: 37.9,29.714 39.5,31.214
  rectangle: 8.895,29.673 10.495,31.173
  rectangle: 15.748,22.65 17.348,24.15
  rectangle: 13.289,30.35 14.889,31.85
  rectangle: 16.594,36.662 18.575,38.042
  rectangle: 14.133,33.412 18.575,36.662
  rectangle: 14.133,36.662 18.133,36.662
  rectangle: 7.493,36.662 16.891,40.491
  rectangle: 5.429,40.491 18.575,40.891
  rectangle: 5.433,36.662 7.493,38.1
  rectangle: 60.412,30.398 63.912,36.548
  rectangle: 57.287,30.228 60.412,36.548
  rectangle: 55.412,36.548 65.812,40.904
  rectangle: 34.951,36.662 36.449,38.1
  rectangle: 36.449,36.662 46.353,40.491
  rectangle: 46.353,36.675 47.785,38.1
  rectangle: 34.951,40.491 47.785,40.904
Bottom Layer:
  rectangle: 15.989,22.75 17.348,24.15
  rectangle: 8.889,29.65 10.539,31.25
  rectangle: 14.133,33.412 18.575,36.662
  rectangle: 5.433,36.662 7.493,38.1
  rectangle: 5.433,40.491 18.575,40.891
  rectangle: 16.594,36.662 18.575,38.042
  rectangle: 7.493,36.662 16.891,40.491
  rectangle: 13.289,30.35 14.889,31.85
  rectangle: 57.252,30.109 60.412,36.548
  rectangle: 60.412,30.243 63.912,36.548
  rectangle: 55.412,36.548 65.812,40.848
  rectangle: 44.953,22.745 46.353,24.145
  rectangle: 42.253,30.345 43.853,31.845
  rectangle: 37.853,29.645 39.503,31.245
  rectangle: 43.353,33.698 47.353,36.695
  rectangle: 46.007,36.675 47.785,38.1
  rectangle: 34.951,40.491 47.785,40.894
  rectangle: 34.951,36.662 36.449,38.1
  rectangle: 36.449,36.662 46.353,40.491
Keep-Out Layer:
  text "'.Layer_Name'" at 300.5,-177.546 h1.5

## Other copper
Top Layer:
  text "'.ProjectRevisionART'" at 335.678,-177.368 h1.5
  text "'.Layer_Name'" at 300.5,-177.546 h1.5
Bottom Layer:
  text "04-'.ProjectPCBNumber'-R'.ProjectRevisionART'" at 242,-127.296 h1.2
  text ".ProjectRevisionART" at 335.678,-177.368 h1.5
  text ".ProjectRevisionART" at 335.678,-177.368 h1.5
  text "'.ProjectRevisionART'" at 335.678,-177.368 h1.5
  text "'.Layer_Name'" at 300.5,-177.546 h1.5

## Silkscreen, mask and mechanical layers (free items; w line width, h text height)
Top Overlay:
  region: 289.8,-140.896 289.8,-138.896 291.8,-139.896
  lines w0.1: 59.577,9.375 59.577,8.375 61.077,8.375 61.077,11.375 60.587,11.375 59.577,11.375 ; 59.577,19.375 59.577,1.355 59.577,0.375 81.077,0.375 81.077,17.875 81.077,20.375 59.577,20.375 59.577,19.395 ; 63.235,8.288 77.135,8.288 77.135,13.195 63.235,13.195 63.235,8.288
  text "RN4871" at 57.541,33.497 h1.1
  text "HERE" at 58.262,31.895 h1.3
  text "RN4678" at 37.719,27.525 h1.3
  text "RN4870" at 8.577,27.497 h1.3
  text "HERE" at 9.852,25.6 h1.3
  text "HERE" at 38.808,25.518 h1.3
  text "RX" at 61.647,15.675 h1 r270
  text "TX" at 64.277,15.675 h1 r270
  text "ADM00393" at 67.04,11.895 h0.8
  text "MCP2200" at 67.64,10.395 h0.8
  text "Breakout board" at 64.74,8.895 h0.8
  text "GND" at 74.422,7.366 h1 r270
  text "VDD" at 76.962,7.366 h1 r270
  text "BLE PROGRAMING/TESTING BOARD V2" at 0.879,1.397 h1.52
  text "C" at 251.245,-130.839 h8
  text "1" at 260.096,-131.445 h5
  text "'.ProjectPartNumber'" at 231.5,-131.796 h1.2
  text "" at 244.245,-132.142 h8
  text "5" at 278.5,-132.99 h8
  text "7" at 288.5,-132.99 h8
  text "0" at 298.5,-132.99 h8
  text "1" at 308.5,-132.99 h8
  text "6" at 268.5,-133.023 h8
  text "2" at 318.5,-133.023 h8
  text "3" at 328.5,-133.023 h8
  text "4" at 338.58,-133.023 h8
  text "ICD" at 284.4,-140.796 h1.52
  text "M" at 262,-147.296 h10
  text "" at 315,-147.755 h10
  text "" at 294,-147.78 h10
  text "" at 305,-147.78 h10
  text "" at 324,-147.78 h10
  text "" at 335,-147.78 h10
  text "" at 346,-147.955 h10
  text "*h" at 227.7,-148.796 h7
  text "" at 286,-150.796 h10
  text "dsPICDEM.net™" at 185.75,-157.546 h3
  text "mTouch®" at 208,-157.546 h3
  text "chipKIT™" at 222.25,-157.546 h3
  text "dsPICDEM™" at 185.5,-163.296 h3
  text "MPLAB®" at 208,-163.796 h3
  text "dsPIC®" at 222.25,-163.796 h3
  text "PICDEM.net™" at 185.5,-169.546 h3
  text "PICkit™" at 208.25,-169.796 h3
  text "PIC®" at 222.25,-169.796 h3
  text "PICDEM™" at 185.5,-176.046 h3
  text "PICtail™" at 208.25,-176.046 h3
  text "'.ProjectRevisionART'" at 335.678,-177.368 h1.5
  text "'.Layer_Name'" at 300.5,-177.546 h1.5
Bottom Overlay:
  text "'.ProjectRevisionART'" at 335.678,-177.368 h1.5
  text "'.Layer_Name'" at 300.5,-177.546 h1.5
Top Paste:
  text "'.ProjectRevisionART'" at 335.678,-177.368 h1.5
  text "'.Layer_Name'" at 300.5,-177.546 h1.5
Bottom Paste:
  text "'.ProjectRevisionART'" at 335.678,-177.368 h1.5
  text "'.Layer_Name'" at 300.5,-177.546 h1.5
Top Solder:
  text "'.ProjectRevisionART'" at 335.678,-177.368 h1.5
  text "'.Layer_Name'" at 300.5,-177.546 h1.5
Bottom Solder:
  text "'.ProjectRevisionART'" at 335.678,-177.368 h1.5
  text "'.Layer_Name'" at 300.5,-177.546 h1.5
NOTES (M1):
  text "ASSEMBLY NOTES:" at 29.4,-127.896 h4
  text "1. ALL COMPONENTS SHALL BE RoHS COMPLIANT." at -4.7,-132.996 h3
  text "2. ALL UNUSED THROUGH HOLE COMPONENT LOCATIONS SHALL BE FREE OF SOLDER." at -4.7,-135.996 h3
  text "3. ALL COMPONENTS SHALL BE MOUNTED FLUSH TO THE BOARD, EXCEPT AS NOTED." at -4.7,-138.996 h3
  text "4. FINISHED BOARD SHALL BE FREE OF ALL RESIDUES." at -4.7,-141.996 h3
  text "5. ALL LEADS SHALL BE TRIMMED TO A MAXIMUM HEIGHT OF 2mm" at -4.7,-144.996 h3
  text "'.Layer_Name'" at 318.5,-177.546 h1.5
BOARD (M2):
  the board outline again, w0.1
  text "'.ProjectRevisionART'" at 335.678,-177.368 h1.5
  text "'.Layer_Name'" at 300.5,-177.546 h1.5
REF POINTS (M3):
  text "'.Layer_Name'" at 300.5,-177.546 h1.5
FAB (M4):
  drawing of 284 lines, arcs and shapes, not listed
  text "THIS PCB TO BE MANUFACTURED TO MEET ALL ACCEPTANCE LEVELS" at 236.989,32.866 h1.78
  text "OF A CLASS 2 PCB PER ANSI/IPC-A-600G." at 236.989,29.056 h1.78
  text "MATERIAL:" at 236.989,24.436 h1.78
  text "FR-4 or Equivalent" at 257.309,24.436 h1.78
  text "CONTROLLED IMPEDANCE" at 313.5,20.204 h1.78
  text "MULTILAYER" at 263.024,20.086 h1.78
  text "2" at 286.519,20.086 h1.78
  text "LAYERS" at 290.964,20.086 h1.78
  text "Cu WEIGHT EXTERNAL LAYERS" at 257.309,15.236 h1.78
  text "35um" at 309.379,15.236 h1.78
  text "FINISHED" at 318.904,15.236 h1.78
  text "Cu WEIGHT INTERNAL LAYERS" at 257.309,10.386 h1.78
  text "N/A" at 309.379,10.386 h1.78
  text "FINISHED" at 318.904,10.386 h1.78
  text "FINISHED OVERALL THICKNESS" at 257.309,5.536 h1.78
  text "1.6" at 310.649,5.536 h1.78
  text "mm" at 318.904,5.536 h1.78
  text "10" at 333.509,5.536 h1.78
  text "%" at 341.764,5.536 h1.78
  text "COPPER THIEVING ALLOWED" at 257.5,0.704 h1.78
  text "YES" at 314.5,0.704 h1.78
  text "NO" at 331.5,0.704 h1.78
  text "X" at 326.091,0.204 h2.6
  text "FINISH:" at 237,-3.796 h1.78
  text "LEAD-FREE HOT AIR LEVELING" at 263,-4.096 h1.78
  text "X" at 258.4,-4.796 h2.6
  text "IMMERSION GOLD" at 263.024,-9.634 h1.78
  text "IMMERSION TIN" at 263.024,-15.134 h1.78
  text "SMOBC WITH SELECTIVE GOLD PLATING ON LANDS" at 263.024,-18.839 h1.78
  text "INDICATED. 1um GOLD OVER 5-10 um NICKEL" at 263.024,-22.649 h1.78
  text "SOLDERMASK" at 257.309,-27.984 h1.78
  text "DYNACHEM EPIC 200 LPI OR EQUIVALENT" at 278.899,-27.984 h1.78
  text "SOLDERMASK COLOR" at 257.309,-34.334 h1.78
  text "GREEN HIGH GLOSS" at 289.059,-34.334 h1.78
  text "SILKSCREEN COLOR" at 257.309,-40.684 h1.78
  text "WHITE" at 289.059,-40.684 h1.78
  text "Blind / Burried Vias" at 263.5,-46.796 h1.78
  text "DRILLING:" at 237.5,-47.046 h1.78
  text "Via Layer Pairs" at 258,-51.546 h1.78
  text "Top-Bottom" at 278.75,-51.546 h1.78
  text "ALL HOLES TO BE LOCATED BY THE COORDINATES FROM THE NC DRILL DATA PROVIDED." at 236.989,-56.796 h1.78
  text "05-'.ProjectPCBNumber'" at 269,-63.296 h1.78
  text "PCB REV" at 305,-63.296 h1.78
  text "USE ARTWORK SET NO." at 236.989,-63.384 h1.78
  text "'.ProjectRevisionART'" at 318.15,-63.546 h1.78
  text "ALL UL LOGO, MANUFACTURER'S ID, AND DATE CODES SHALL BE PLACED" at 236.989,-69.734 h1.78
  text "ON THE BOTTOM SIDE UNLESS OTHERWISE INDICATED." at 236.989,-73.544 h1.78
  text "ANY ALTERNATIVES TO THE ABOVE SPECIFICATIONS MUST FIRST BE APPROVED." at 236.5,-78.796 h1.78
  text "Layer" at 224.029,-85.471 h1.52
  text "Name" at 234.441,-85.471 h1.52
  text "Material" at 258.056,-85.471 h1.52
  text "Thickness" at 279.894,-85.471 h1.52
  text "Constant" at 296.4,-85.471 h1.52
  text "Gerber" at 310.875,-85.471 h1.52
  text "Board Layer Stack" at 322.81,-85.471 h1.52
  text "Top Overlay" at 234.441,-88.519 h1.52
  text "GTO" at 310.875,-88.519 h1.52
  text "Top Solder" at 234.441,-91.567 h1.52
  text "Solder Resist" at 258.056,-91.567 h1.52
  text "0.010mm" at 279.894,-91.567 h1.52
  text "3.5" at 296.4,-91.567 h1.52
  text "GTS" at 310.875,-91.567 h1.52
  text "1" at 224.029,-94.615 h1.52
  text "Top Layer" at 234.441,-94.615 h1.52
  text "0.035mm" at 279.894,-94.615 h1.52
  text "GTL" at 310.875,-94.615 h1.52
  text "Dielectric1" at 234.441,-97.663 h1.52
  text "FR-4" at 258.056,-97.663 h1.52
  text "1.500mm" at 279.894,-97.663 h1.52
  text "4.8" at 296.4,-97.663 h1.52
  text "2" at 224.029,-100.711 h1.52
  text "Bottom Layer" at 234.441,-100.711 h1.52
  text "0.035mm" at 279.894,-100.711 h1.52
  text "GBL" at 310.875,-100.711 h1.52
  text "Bottom Solder" at 234.441,-103.759 h1.52
  text "Solder Resist" at 258.056,-103.759 h1.52
  text "0.010mm" at 279.894,-103.759 h1.52
  text "3.5" at 296.4,-103.759 h1.52
  text "GBS" at 310.875,-103.759 h1.52
  text "Bottom Overlay" at 234.441,-106.807 h1.52
  text "GBO" at 310.875,-106.807 h1.52
  text "Total board thickness:" at 224.029,-109.855 h1.52
  text "1.590mm" at 279.894,-109.855 h1.52
  text "'.ProjectRevisionFAB'" at 335.678,-177.368 h1.5
  text "'.Layer_Name'" at 300.5,-177.546 h1.5
Case (M5):
  text "'.Layer_Name'" at 300.5,-177.546 h1.5
Cover (M6):
  text "'.Layer_Name'" at 300.5,-177.546 h1.5
Terminal Block (M7):
  text "'.Layer_Name'" at 300.5,-177.546 h1.5
Route Tool Path:
  text "'.Layer_Name'" at 300.5,-177.546 h1.5
V-Cut (M9):
  text "'.Layer_Name'" at 300.5,-177.546 h1.5
Bottom Assembly:
  text "'.VariantName'" at 50.07,-161.546 h0.9
  text "ASSEMBLY VARIANT:" at 64.32,-161.546 h0.9
  text "DOCUMENT NUMBER:" at 18.05,-169.796 h1.14
  text "02-'.ProjectPCBAssyNumber'-D" at 17.8,-172.796 h1.6
  text "'.ProjectRevisionASSY'" at 1.122,-177.368 h1.5
  text "'.Layer_Name'" at 36,-177.546 h1
Top Assembly:
  text "6. PLACE LABEL  ON THE LOCATION INDICATED." at -4.7,-147.996 h3
  text "7." at -4.7,-150.996 h3
  text "ASSEMBLY VARIANT:" at 272.5,-161.546 h0.9
  text "'.VariantName'" at 286.75,-161.546 h0.9
  text "DOCUMENT NUMBER:" at 318.75,-169.796 h1.15
  text "02-'.ProjectPCBAssyNumber'-D" at 319,-172.796 h1.6
  text "'.ProjectRevisionASSY'" at 335.678,-177.368 h1.5
  text "'.Layer_Name'" at 300.5,-177.546 h1
Bottom 3D Body:
  text "'.Layer_Name'" at 300.5,-177.546 h1.15
Top 3D Body:
  text "'.Layer_Name'" at 300.5,-177.546 h1.2
Bottom Courtyard:
  text ".ProjectRevisionART" at 335.678,-177.368 h1.5
  text "'.Layer_Name'" at 300.5,-177.546 h1
Top Courtyard:
  text "'.ProjectRevisionART'" at 335.678,-177.368 h1.5
  text "'.Layer_Name'" at 300.5,-177.546 h1.1
TITLE (M16):
  lines w0.1: 272,-160.296 353.82,-160.296 ; 324,-152.796 324,-155.796 353.82,-155.796 ; 342.54,-177.431 342.54,-176.161 ; 342.54,-176.796 352.7,-176.796 ; 342.7,-175.596 342.7,-174.596 ; 342.7,-175.096 352.7,-175.096 ; 345.08,-177.431 345.08,-176.161 ; 347.62,-177.431 347.62,-176.161 ; 347.7,-175.396 347.7,-174.796 ; 350.16,-177.431 350.16,-176.161 ; 352.7,-177.431 352.7,-176.161 ; 352.7,-175.596 352.7,-174.596 ; 353.82,-155.796 353.82,-155.796
  lines w0.127: -22.1,-122.971 -17.02,-122.971 ; -22.1,-62.646 -17.02,-62.646 ; -22.1,-2.321 -17.02,-2.321 ; 41.4,-183.296 41.4,-178.216 ; 41.4,52.924 41.4,58.004 ; 104.9,-183.296 104.9,-178.216 ; 104.9,52.924 104.9,58.004 ; 168.4,-183.296 168.4,-178.216 ; 168.4,52.924 168.4,58.004 ; 203.96,-178.216 239.52,-178.216 ; 231.9,-183.296 231.9,-178.216 ; 231.9,52.924 231.9,58.004 ; 272,-178.216 272,-152.796 ; 272,-173.796 353.82,-173.796 ; 272,-167.796 353.82,-167.796 ; 272,-161.796 353.82,-161.796 ; 295.4,-183.296 295.4,-178.216 ; 295.4,52.924 295.4,58.004 ; 300,-178.216 300,-161.796 ; 318,-173.796 318,-167.796 ; 331,-178.216 331,-173.796 ; 338.5,-178.216 338.5,-167.796 ; 353.82,-147.736 353.82,-178.216 ; 353.82,-122.971 358.9,-122.971 ; 353.82,-62.646 358.9,-62.646 ; 353.82,-2.321 358.9,-2.321 ; 353.82,-178.216 353.82,-152.796 238,-152.796 238,-178.216 353.82,-178.216 ; 353.82,-178.216 -17.02,-178.216 -17.02,52.924 353.82,52.924 353.82,-178.216 ; -22.1,-183.296 358.9,-183.296 358.9,58.004 -22.1,58.004 -22.1,-183.296
  lines w0.254: 243.32,43.924 243.32,48.424 243.32,52.924 ; 255.82,43.924 255.82,48.424 255.82,52.924 ; 334.32,43.924 334.32,48.424 334.32,52.924 ; 353.82,48.424 232.32,48.424 ; 232.32,48.424 232.32,52.924 353.82,52.924 353.82,43.924 232.32,43.924 232.32,48.424
  text "1" at 9.176,54.702 h1.78
  text "2" at 72.566,54.702 h1.78
  text "3" at 135.795,54.702 h1.78
  text "4" at 199.464,54.702 h1.78
  text "5" at 262.939,54.702 h1.78
  text "6" at 326.566,54.702 h1.78
  text "REV" at 234.82,49.924 h1.52
  text "ECO" at 244.82,49.924 h1.52
  text "Comments" at 291.32,49.424 h1.52
  text "Date" at 339.32,49.424 h1.52
  text "A" at -20.195,25.67 h1.78
  text "A" at 355.725,25.67 h1.78
  text "B" at -20.195,-34.782 h1.78
  text "B" at 355.725,-34.782 h1.78
  text "C" at -20.195,-95.107 h1.78
  text "C" at 355.725,-95.107 h1.78
  text "PART NUMBER:" at 325,-154.796 h1
  text "'.ProjectpartNumber'" at 337,-155.046 h1.5
  text "D" at -20.195,-155.305 h1.78
  text "TITLE:" at 273,-155.296 h1.14
  text "D" at 355.725,-155.305 h1.78
  text "'.ProjectTitle'" at 273,-159.296 h2.5
  text "PCB Layout Contact:" at 273,-163.796 h1.15
  text "GERBER FILE:" at 301,-163.796 h1.15
  text "'.ProjectDrawnBy'" at 273,-166.796 h1.6
  text "'.Plot_File_Name'" at 301,-166.796 h1.5
  text "M" at 241,-168.796 h15.24
  text "Project Owner:" at 273,-169.796 h1.15
  text "BOARD NUMBER:" at 301,-169.796 h1.15
  text "DATE:" at 339.7,-169.796 h1.14
  text "Microchip Technology Inc." at 239.77,-172.056 h1.78
  text "'.ProjectEngineer'" at 273,-172.796 h1.6
  text "04-'.ProjectPCBNumber'" at 301,-172.796 h1.6
  text "'.PRINT_DATE'" at 339.7,-172.796 h1.5
  text "2355 W. Chandler Blvd." at 241,-174.796 h1.78
  text "LAYER NAME:" at 301,-175.296 h1.14
  text "10mm" at 339,-175.396 h0.7
  text "PCB FILE NAME:" at 273,-175.546 h1.15
  text "REV:" at 331.75,-175.546 h1.14
  text "400mil" at 338.9,-177.096 h0.7
  text "Chandler, AZ  85224" at 242,-177.296 h1.78
  text "'.PCB_FILE_NAME_NO_PATH'" at 273,-177.546 h1
  text "1" at 9.176,-181.518 h1.78
  text "2" at 72.566,-181.518 h1.78
  text "3" at 135.795,-181.518 h1.78
  text "4" at 199.464,-181.518 h1.78
  text "5" at 262.939,-181.518 h1.78
  text "6" at 326.566,-181.518 h1.78
Drill Drawing:
  circle w0.25: c-5.348,-91.943 r0.833
  lines w0.25: -6.181,-95.693 -5.348,-96.526 -4.514,-95.693 -5.348,-94.859 -6.181,-95.693 ; -6.181,-88.609 -5.764,-88.609 -5.764,-89.026 -4.931,-89.026 -4.931,-88.609 -4.514,-88.609 -4.514,-87.776 -4.931,-87.776 -4.931,-87.359 -5.764,-87.359 -5.764,-87.776 -6.181,-87.776 -6.181,-88.609 ; -6.181,-85.276 -4.514,-85.276 -4.514,-83.609 -6.181,-83.609 -6.181,-85.276 ; -6.181,-81.526 -6.181,-81.109 -5.764,-80.693 -6.181,-80.276 -6.181,-79.859 -5.764,-79.859 -5.348,-80.276 -4.931,-79.859 -4.514,-79.859 -4.514,-80.276 -4.931,-80.693 -4.514,-81.109 -4.514,-81.526 -4.931,-81.526 -5.348,-81.109 -5.764,-81.526 -6.181,-81.526 ; -6.181,-76.109 -4.514,-76.109 -5.348,-77.776 -6.181,-76.109 ; -6.181,-73.609 -5.764,-73.609 -5.348,-74.026 -4.931,-73.609 -4.514,-73.609 -4.931,-73.193 -4.514,-72.776 -4.931,-72.776 -5.348,-72.359 -5.764,-72.776 -6.181,-72.776 -5.764,-73.193 -6.181,-73.609 ; -6.181,-70.276 -5.348,-69.859 -4.514,-70.276 -4.931,-69.443 -4.514,-68.609 -5.348,-69.026 -6.181,-68.609 -5.764,-69.443 -6.181,-70.276
  lines w0.3: -7.676,-97.651 202.716,-97.651 ; -7.676,-67.651 202.716,-67.651 ; 6.096,-101.401 6.096,-63.901 ; 23.541,-101.401 23.541,-63.901 ; 57.182,-101.401 57.182,-63.901 ; 69.828,-101.401 69.828,-63.901 ; 107.317,-101.401 107.317,-63.901 ; 122.063,-101.401 122.063,-63.901 ; 140.408,-101.401 140.408,-63.901 ; 167.651,-101.401 167.651,-63.901 ; -7.676,-101.401 202.716,-101.401 202.716,-63.901 -7.676,-63.901 -7.676,-101.401
  text "Symbol" at -5.426,-66.526 h1.8
  text "Hit Count" at 7.221,-66.526 h1.8
  text "Finished Hole Size" at 24.666,-66.526 h1.8
  text "Plated" at 58.307,-66.526 h1.8
  text "Drill Layer Pair" at 70.953,-66.526 h1.8
  text "Via/Pad" at 108.442,-66.526 h1.8
  text "Hole Type" at 123.188,-66.526 h1.8
  text "Hole Length" at 141.533,-66.526 h1.8
  text "Routed Path Length" at 168.776,-66.526 h1.8
  text "4" at 7.221,-70.276 h1.5
  text "0.400mm (15.75mil)" at 24.666,-70.276 h1.5
  text "PTH" at 58.307,-70.276 h1.5
  text "Top Layer - Bottom Layer" at 70.953,-70.276 h1.5
  text "Via" at 108.442,-70.276 h1.5
  text "Round" at 123.188,-70.276 h1.5
  text "-" at 141.533,-70.276 h1.5
  text "-" at 168.776,-70.276 h1.5
  text "6" at 7.221,-74.026 h1.5
  text "0.800mm (31.50mil)" at 24.666,-74.026 h1.5
  text "PTH" at 58.307,-74.026 h1.5
  text "Top Layer - Bottom Layer" at 70.953,-74.026 h1.5
  text "Pad" at 108.442,-74.026 h1.5
  text "Round" at 123.188,-74.026 h1.5
  text "-" at 141.533,-74.026 h1.5
  text "-" at 168.776,-74.026 h1.5
  text "10" at 7.221,-77.776 h1.5
  text "1.000mm (39.37mil)" at 24.666,-77.776 h1.5
  text "PTH" at 58.307,-77.776 h1.5
  text "Top Layer - Bottom Layer" at 70.953,-77.776 h1.5
  text "Pad" at 108.442,-77.776 h1.5
  text "Round" at 123.188,-77.776 h1.5
  text "-" at 141.533,-77.776 h1.5
  text "-" at 168.776,-77.776 h1.5
  text "16" at 7.221,-81.526 h1.5
  text "0.650mm (25.59mil)" at 24.666,-81.526 h1.5
  text "PTH" at 58.307,-81.526 h1.5
  text "Top Layer - Bottom Layer" at 70.953,-81.526 h1.5
  text "Pad" at 108.442,-81.526 h1.5
  text "Slot" at 123.188,-81.526 h1.5
  text "1.700mm (66.93mil)" at 141.533,-81.526 h1.5
  text "1.050mm (41.34mil)" at 168.776,-81.526 h1.5
  text "20" at 7.221,-85.276 h1.5
  text "0.900mm (35.43mil)" at 24.666,-85.276 h1.5
  text "PTH" at 58.307,-85.276 h1.5
  text "Top Layer - Bottom Layer" at 70.953,-85.276 h1.5
  text "Pad" at 108.442,-85.276 h1.5
  text "Round" at 123.188,-85.276 h1.5
  text "-" at 141.533,-85.276 h1.5
  text "-" at 168.776,-85.276 h1.5
  text "36" at 7.221,-89.026 h1.5
  text "0.300mm (11.81mil)" at 24.666,-89.026 h1.5
  text "PTH" at 58.307,-89.026 h1.5
  text "Top Layer - Bottom Layer" at 70.953,-89.026 h1.5
  text "Via" at 108.442,-89.026 h1.5
  text "Round" at 123.188,-89.026 h1.5
  text "-" at 141.533,-89.026 h1.5
  text "-" at 168.776,-89.026 h1.5
  text "66" at 7.221,-92.776 h1.5
  text "0.600mm (23.62mil)" at 24.666,-92.776 h1.5
  text "PTH" at 58.307,-92.776 h1.5
  text "Top Layer - Bottom Layer" at 70.953,-92.776 h1.5
  text "Pad" at 108.442,-92.776 h1.5
  text "Slot" at 123.188,-92.776 h1.5
  text "1.700mm (66.93mil)" at 141.533,-92.776 h1.5
  text "1.100mm (43.31mil)" at 168.776,-92.776 h1.5
  text "82" at 7.221,-96.526 h1.5
  text "0.600mm (23.62mil)" at 24.666,-96.526 h1.5
  text "PTH" at 58.307,-96.526 h1.5
  text "Top Layer - Bottom Layer" at 70.953,-96.526 h1.5
  text "Pad" at 108.442,-96.526 h1.5
  text "Round" at 123.188,-96.526 h1.5
  text "-" at 141.533,-96.526 h1.5
  text "-" at 168.776,-96.526 h1.5
  text "240 Total" at 7.221,-100.276 h1.5
  text "Slot definitions :" at -5.426,-103.9 h1.5
  text "Routed Path Length" at 20.391,-103.9 h1.5
  text "= Calculated from tool start centre position to tool end centre position." at 47.958,-103.9 h1.5
  text "Hole Length" at 20.391,-106.4 h1.5
  text "= Routed Path Length + Tool Size = Slot length as defined in the PCB layout" at 37.711,-106.4 h1.5
  text "DOCUMENT NUMBER:" at 318.75,-169.796 h1.15
  text "04-'.ProjectPCBNumber'-D" at 319,-172.796 h1.6
  text "'.ProjectRevisionFAB'" at 335.678,-177.368 h1.5
TITLE MIRROR (M17):
  lines w0.1: -15.9,-177.431 -15.9,-176.161 ; -15.9,-176.796 -5.74,-176.796 ; -15.9,-175.596 -15.9,-174.596 ; -15.9,-175.096 -5.9,-175.096 ; -13.36,-177.431 -13.36,-176.161 ; -10.9,-175.396 -10.9,-174.796 ; -10.82,-177.431 -10.82,-176.161 ; -8.28,-177.431 -8.28,-176.161 ; -5.9,-175.596 -5.9,-174.596 ; -5.74,-177.431 -5.74,-176.161
  lines w0.127: -22.1,-122.971 -17.02,-122.971 ; -22.1,-62.646 -17.02,-62.646 ; -22.1,-2.321 -17.02,-2.321 ; -17.02,-173.796 64.8,-173.796 ; -17.02,-167.796 64.8,-167.796 ; -17,-161.796 64.82,-161.796 ; -17,-160.296 64.82,-160.296 ; -17,-155.796 -16.383,-155.796 ; -1.7,-178.216 -1.7,-167.796 ; 5.8,-178.216 5.8,-173.796 ; 12.82,-152.796 12.82,-155.796 -16.383,-155.796 ; 18.8,-173.796 18.8,-167.796 ; 36.82,-178.216 36.82,-161.796 ; 41.4,-183.296 41.4,-178.216 ; 41.4,52.924 41.4,58.004 ; 64.82,-178.216 64.82,-152.796 ; 104.9,-183.296 104.9,-178.216 ; 104.9,52.924 104.9,58.004 ; 168.4,-183.296 168.4,-178.216 ; 168.4,52.924 168.4,58.004 ; 231.9,-183.296 231.9,-178.216 ; 231.9,52.924 231.9,58.004 ; 295.4,-183.296 295.4,-178.216 ; 295.4,52.924 295.4,58.004 ; 353.82,-122.971 358.9,-122.971 ; 353.82,-62.646 358.9,-62.646 ; 353.82,-2.321 358.9,-2.321 ; -17.02,-178.216 98.82,-178.216 98.82,-152.796 -17.02,-152.796 -17.02,-178.216 ; -17.02,-178.216 -17.02,52.924 353.82,52.924 353.82,-178.216 -17.02,-178.216 ; -16.383,-155.796 -16.383,-155.796 ; -22.1,-183.296 -22.1,58.004 358.9,58.004 358.9,-183.296 -22.1,-183.296
  text "6" at 10.234,54.702 h1.78
  text "5" at 73.861,54.702 h1.78
  text "4" at 137.336,54.702 h1.78
  text "3" at 201.005,54.702 h1.78
  text "2" at 264.234,54.702 h1.78
  text "1" at 327.624,54.702 h1.78
  text "A" at -18.925,25.67 h1.78
  text "A" at 356.995,25.67 h1.78
  text "B" at -18.925,-34.782 h1.78
  text "B" at 356.995,-34.782 h1.78
  text "C" at -18.925,-95.107 h1.78
  text "C" at 356.995,-95.107 h1.78